# EAGLE board relogio_transistor (EAGLE 7.6.0)

Size 73.58 x 63.39 mm. Coordinates in mm from the lower left corner, seen from the top.
Outline: 0,0 56.82,0 56.82,53.33 0,53.33 0,0
Copper layers (1*16): Top 0.035mm / dielectric 1.5mm / Bottom 0.035mm
Design rules "default": minimum track width 10mil, minimum drill 24mil, track to track 8mil, track to pad 8mil, pad to pad 8mil, via to via 8mil, smd to smd 8mil, copper to edge 40mil, drill to drill 8mil, minimum pad ring 10mil, minimum via ring 8mil, stop-mask expansion 4mil, vias tented up to drill 0mil, thermal gap 10mil

## Footprints (pad centres in the part's own frame; a part is rotated, then mirrored left to right if it is on the bottom)
HDSP-M = drill 0.813 long: 1 -5.08,-7.62; 2 -2.54,-7.62; 3 0,-7.62; 4 2.54,-7.62; 5 5.08,-7.62; 6 5.08,7.62; 7 2.54,7.62; 8 0,7.62; 9 -2.54,7.62; 10 -5.08,7.62
0207/10 = drill 0.813 octagon: 1 -5.08,0; 2 5.08,0
TO92 = drill 0.813 octagon: 1 1.27,0; 2 0,1.905; 3 -1.27,0
ARDUINO_UNO = drill 1.016 pad 1.88: 0 63.5,50.8; 1 60.96,50.8; 2 58.42,50.8; 3 55.88,50.8; 3.3V 35.56,2.54; 4 53.34,50.8; 5 50.8,50.8; 5V 38.1,2.54; 6 48.26,50.8; 7 45.72,50.8; 8 41.656,50.8; 9 39.116,50.8; 10 36.576,50.8; 11 34.036,50.8; 12 31.496,50.8; 13 28.956,50.8; A0 50.8,2.54; A1 53.34,2.54; A2 55.88,2.54; A3 58.42,2.54; A4 60.96,2.54; A5 63.5,2.54; AREF 23.876,50.8; GND 26.416,50.8; GND. 43.18,2.54; GND.. 40.64,2.54; I/OREF 30.48,2.54; N/C 27.94,2.54; RESET 33.02,2.54; SCL 18.796,50.8; SDA 21.336,50.8; VIN 45.72,2.54 | hole 3.2: 66.04,7.62; 66.04,35.56; 15.24,50.8; 13.97,2.54

## Placement (x,y rotation side)
Digit1  [HDSP-M]  5,340.28 0 top  (outside the outline)
Digit2  [HDSP-M]  5,352.98 0 top  (outside the outline)
Digit3  [HDSP-M]  5,365.68 0 top  (outside the outline)
Digit4  [HDSP-M]  5,378.38 0 top  (outside the outline)
Digit5  [HDSP-M]  5,391.08 0 top  (outside the outline)
Digit6  [HDSP-M]  5,403.78 0 top  (outside the outline)
R1  330‎Ω  [0207/10]  5,35.48 0 top
R2  300‎Ω  [0207/10]  5,111.68 0 top  (outside the outline)
R3  300‎Ω  [0207/10]  5,124.38 0 top  (outside the outline)
R4  300‎Ω  [0207/10]  5,137.08 0 top  (outside the outline)
R5  300‎Ω  [0207/10]  5,149.78 0 top  (outside the outline)
R6  300‎Ω  [0207/10]  5,162.48 0 top  (outside the outline)
R7  1k‎Ω  [0207/10]  5,175.18 0 top  (outside the outline)
R8  1k‎Ω  [0207/10]  5,187.88 0 top  (outside the outline)
R9  1k‎Ω  [0207/10]  5,200.58 0 top  (outside the outline)
R10  1k‎Ω  [0207/10]  5,213.28 0 top  (outside the outline)
R11  1k‎Ω  [0207/10]  5,225.98 0 top  (outside the outline)
R12  1k‎Ω  [0207/10]  5,238.68 0 top  (outside the outline)
R13  330‎Ω  [0207/10]  5,251.38 0 top  (outside the outline)
R14  330‎Ω  [0207/10]  5,264.08 0 top  (outside the outline)
R15  330‎Ω  [0207/10]  5,276.78 0 top  (outside the outline)
R16  330‎Ω  [0207/10]  5,289.48 0 top  (outside the outline)
R17  330‎Ω  [0207/10]  5,302.18 0 top  (outside the outline)
R18  330‎Ω  [0207/10]  5,314.88 0 top  (outside the outline)
R19  330‎Ω  [0207/10]  5,327.58 0 top  (outside the outline)
T1  [TO92]  5,22.78 0 top
T2  [TO92]  5,48.18 0 top
T3  [TO92]  5,60.88 0 top
T4  [TO92]  5,73.58 0 top  (outside the outline)
T5  [TO92]  5,86.28 0 top  (outside the outline)
T6  [TO92]  5,98.98 0 top  (outside the outline)
U1  [ARDUINO_UNO]  5,10.08 0 top

## Library data of the parts
Digit1-Digit6 R1-R19 T1-T6 U1 = AUTODESK_CIRCUITS_BREADBOARD

## Nets
N$1: R7.2 T1.2
N$2: Digit1.3 R1.1 T1.3
N$3: R8.2 T2.2
N$4: R9.2 T3.2
N$5: R10.2 T4.2
N$6: R11.2 T5.2
N$7: R12.2 T6.2
N$8: Digit2.3 R2.1 T2.3
N$9: Digit3.3 R3.1 T3.3
N$10: Digit4.3 R4.1 T4.3
N$11: Digit5.3 R5.1 T5.3
N$12: Digit6.3 R6.1 T6.3
N$13: R7.1 U1.13
N$14: R8.1 U1.12
N$15: R9.1 U1.11
N$16: R10.1 U1.10
N$17: R11.1 U1.9
N$18: R12.1 U1.8
N$19: Digit1.10 Digit2.10 Digit3.10 Digit4.10 Digit5.10 Digit6.10 R13.2
N$20: R13.1 U1.6
N$21: Digit1.9 Digit2.9 Digit3.9 Digit4.9 Digit5.9 Digit6.9 R14.2
N$22: R14.1 U1.5
N$23: Digit1.1 Digit2.1 Digit3.1 Digit4.1 Digit5.1 Digit6.1 R15.2
N$24: R15.1 U1.4
N$25: Digit1.2 Digit2.2 Digit3.2 Digit4.2 Digit5.2 Digit6.2 R16.2
N$26: R16.1 U1.3
N$27: Digit1.4 Digit2.4 Digit3.4 Digit4.4 Digit5.4 Digit6.4 R17.2
N$28: R17.1 U1.2
N$29: Digit1.6 Digit2.6 Digit3.6 Digit4.6 Digit5.6 Digit6.6 R18.2
N$30: R18.1 U1.1
N$31: Digit1.7 Digit2.7 Digit3.7 Digit4.7 Digit5.7 Digit6.7 R19.2
N$32: R19.1 U1.0
N$33: Digit1.5
N$34: Digit2.8
N$35: Digit2.5
N$36: Digit3.8
N$37: Digit3.5
N$38: Digit4.8
N$39: Digit4.5
N$40: Digit5.8
N$41: Digit5.5
N$42: Digit1.8
N$43: Digit6.8
N$44: Digit6.5
N$45: R1.2 R2.2 R3.2 R4.2 R5.2 R6.2 U1.5V
N$46: T1.1 T2.1 T3.1 T4.1 T5.1 T6.1 U1.GND..

## Tracks (layer width: path | path; a pad name or v marks a point on that pad's centre or on a via)
N$1  (1 unrouted)
N$2  (2 unrouted)
N$3  (1 unrouted)
N$4  (1 unrouted)
N$5  (1 unrouted)
N$6  (1 unrouted)
N$7  (1 unrouted)
N$8  (2 unrouted)
N$9  (2 unrouted)
N$10  (2 unrouted)
N$11  (2 unrouted)
N$12  (2 unrouted)
N$13  (1 unrouted)
N$14  (1 unrouted)
N$15  (1 unrouted)
N$16  (1 unrouted)
N$17  (1 unrouted)
N$18  (1 unrouted)
N$19  (6 unrouted)
N$20  (1 unrouted)
N$21  (6 unrouted)
N$22  (1 unrouted)
N$23  (6 unrouted)
N$24  (1 unrouted)
N$25  (6 unrouted)
N$26  (1 unrouted)
N$27  (6 unrouted)
N$28  (1 unrouted)
N$29  (6 unrouted)
N$30  (1 unrouted)
N$31  (6 unrouted)
N$32  (1 unrouted)
N$45  (6 unrouted)
N$46  (6 unrouted)